# Altium PCB BMSPowerDistribution.PcbDoc (part 4 of 6)
Units mil, origin at the board's own origin, x right, y up, seen from the top; angles counter-clockwise.
Board outline 5328.74 x 5315 mil, 4 copper layers (Top Layer, Layer 1, Layer 2, Bottom Layer), stack 24.6 mil thick; 321 components, 209 nets, 1075 pads, 489 vias.
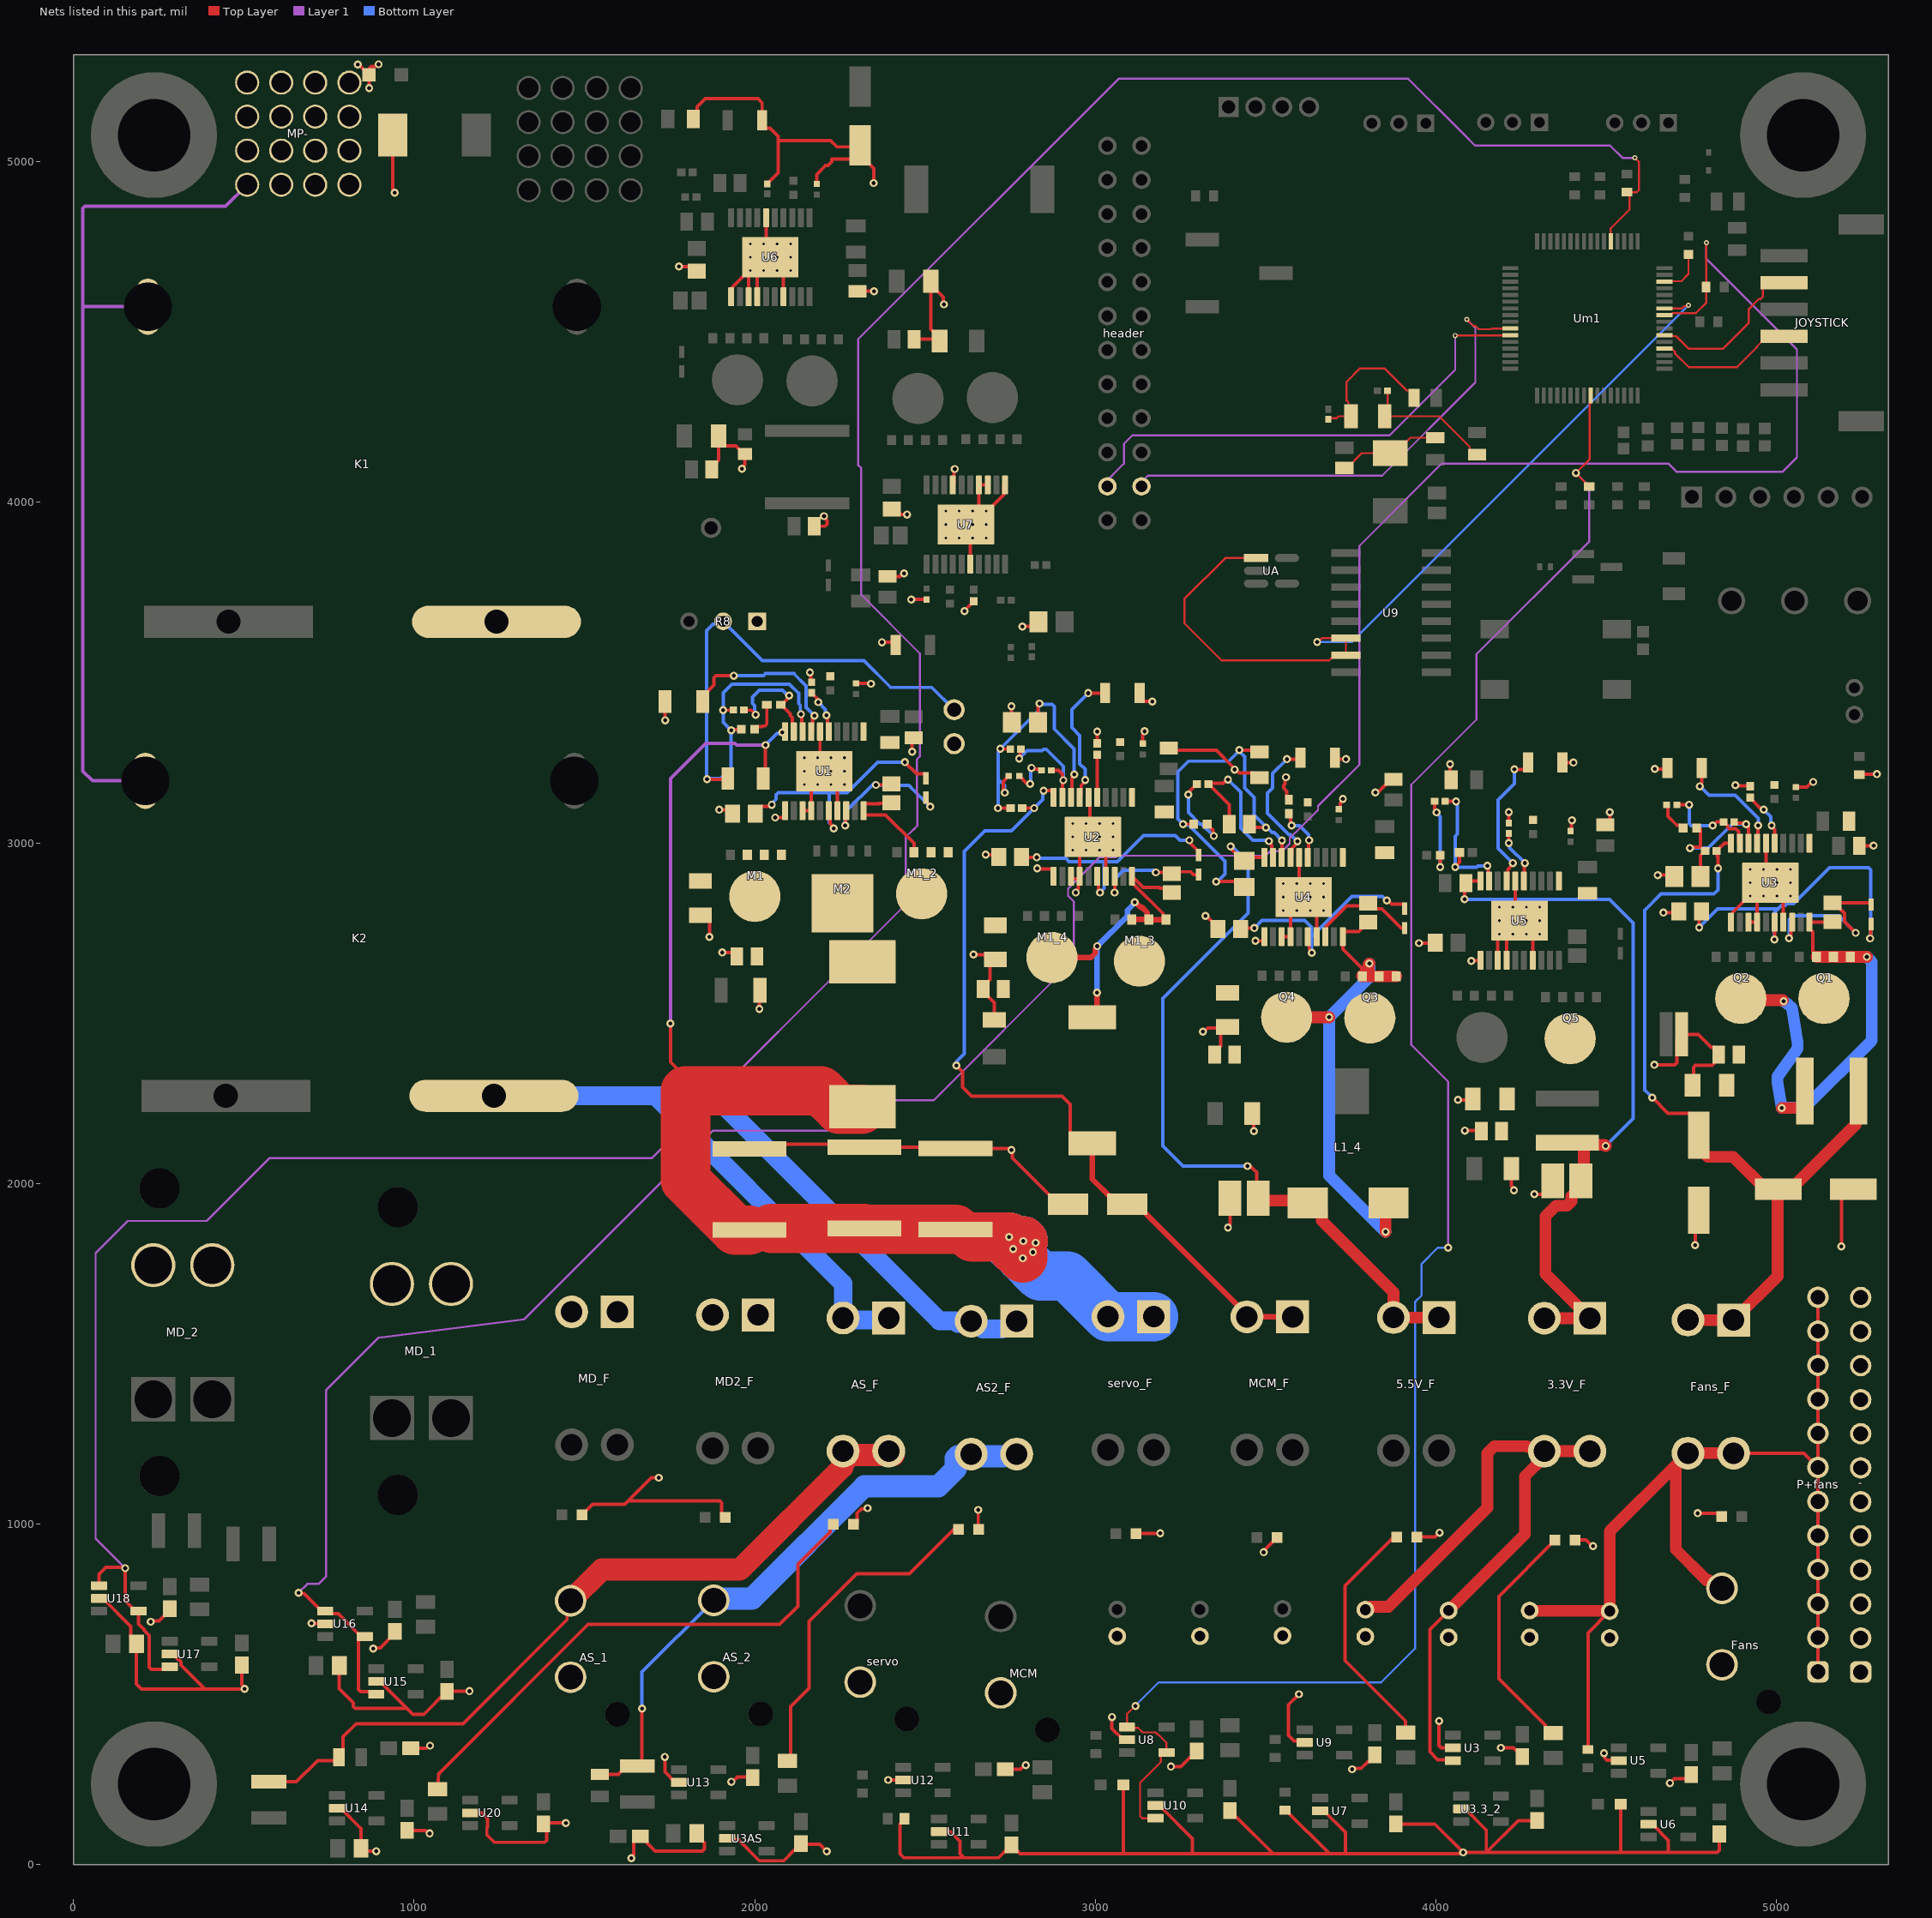
[diagram p5: the nets of this part, all layers, seen from the top]

## Via types
v1: diameter 23.62, hole 11.81, Top Layer to Bottom Layer, 370 vias
v2: diameter 19.68, hole 7.87, Top Layer to Bottom Layer, 84 vias
v3: diameter 15, hole 8, Top Layer to Bottom Layer, 35 vias

## Nets (pads, with @x,y where several pads share a name; then routed paths per layer and width w, separated by ;. In a path a pad name is that pad's centre, name@x,y a point inside that pad or via, vN(x,y) a via of type N, cw(c..) or ccw(c..) an arc to the next point about the centre after c; other vN are vias at no path point) (continued)
GND: 3.3_E.2 3.3_LG.2 3.3V_L.1 5.5V_L.1 5_E.2 5_ECB.2 5_LG.2 12_E.2 12_ECB.2 -.1 -.2 -.3 -.4 -.5 -.6 -.7 -.8 -.9 -.10 -.11 -.12 AS2_L.1 AS_1.2 AS_2.2 AS_L.1 C14.2 C15.2 C16.1 C17.2 C21.1 C22.2 C23.2 C24.2 C25.2 C26.1 C31.1 C40.2 C41.2 C42.2 C61.2 C62.2 C63.2 C64.1 C67.1 C69.2 C70.2 C71.1 C72.1 C75.1 C77.2 C78.2 C79.2 C80.2 C81.1 C84.1 C86.2 Cb1.2 Cb2.2 Cb3.2 Cb4.2 Cb5.2 Cb6.2 Cb7.2 Cb8.2 Cb9.2 Cb11.2 Cb12.2 Cb13.2 Cb14.2 Cb16.2 Cb17.2 Cb18.2 Cb19.2 Cbp2.2 Cbp.2 Cbx.2 Ci6.2 Ci7.2 Cin2.2 Cinx2.2 Co_6.2 Cr7.2 CR15.2 Cr.2 Cs7.1 Cs.1 Ct7.2 Cv7.1 Cv.1 Cx6.2 Cx7.2 F_L.1 Fans.2 J2.2 K1.6 K2.6 MCM.2@2722.44,503.94 MCM_L.1 MD2_L.1 MD_1.21 MD_1.22 MD_2.21 MD_2.22 MD_L.1 MP-.1 NT1.2 R3.1 R4.2 R6.1 R8.3 R11.2 R13.1 R14.2 R17.2 R19.1 R21.2 R23.1 R24.2 R27.2 R29.1 R41.2 R43.1 R44.2 R47.2 R49.1 R51.2 R54.1 R55.2 R57.2 R59.1 RAS2.1 RAS4.1 Rb7.1 Rfb.1 RM2.1 RM4.1 Rs7.2 Rs.1 RSW.1 Rt7.2 Rt.2 RU2.1 Ruv7.1 servo.2 servo_L.1 U1.6 U1.11 U1.13 U1.14 U1.17 U1.21 U2.6 U2.11 U2.13 U2.14 U2.17 U2.21 U3.2@4050.2,342.52 U3.3_2.2 U3.6 U3.11 U3.13 U3.14 U3.17 U3.21 U3AS.2 U4.6 U4.11 U4.13 U4.14 U4.17 U4.21 U5.2@4537.4,305.12 U5.6 U5.11 U5.13 U5.14 U5.17 U5.21 U6.2@4625,118.11 U6.6 U6.11 U6.13 U6.14 U6.17 U6.21 U7.2@3660.43,157.48 U7.6 U7.11 U7.13 U7.14 U7.17 U7.21 U8.2 U9.2@3615.16,358.27 U10.2 U11.2 U12.2 U13.2 U14.2 U15.2 U16.2 U17.2 U18.2 U20.2 | length 22803.5
  Top Layer w10: U18.2@74.8,781.5 85.63,781.5 168.24,698.89 168.24,664.46 RM4.1@184.89,647.81 184.89,529.68 199.8,514.77 385.82,514.77 ; K2.6@210.8,3182.57 K2.6@219.35,3174.02 ; v1(226.38,712.6) 228.98,715.2 251.49,715.2 282.48,746.2 Cb3.2@282.48,750.98 ; U17.2@282.48,618.11 293.31,618.11 301.1,610.31 301.1,608.36 306.96,602.5 308.71,602.5 315.1,596.11 315.1,585.49 385.82,514.77 ; Cb4.2@494.09,585.61 494.09,527.31 501.97,519.43 v1(501.97,515.75) 500.99,514.77 385.82,514.77 ; v1(698.82,708.66) 699.8,707.68 738.19,707.68 U16.2@739.17,706.69 ; U14.2@773.62,165.35 784.45,165.35 844.49,105.31 RAS2.1@844.49,47.24 844.49,41.34 846.83,39 v1(888.72,39) ; RM2.1@780.51,584.65 780.51,516.2 821.72,475 821.72,463.86 827.57,458 979.01,458 ; v1(834.82,5286.42) 837.08,5286.42 NT1.2@867.6,5255.91 ; v1(868.11,5216.54) 868.11,5255.39 NT1.2@867.6,5255.91 ; v1(879.92,633.86) 882.53,636.46 900.3,636.46 943.24,679.41 Cb1.2@943.24,684.19 ; U15.2@888.78,537.4 899.61,537.4 979.01,458 ; v1(895.67,5286.72) 891.98,5286.72 885.17,5279.91 873.87,5279.91 868.6,5274.63 868.6,5256.91 NT1.2@867.6,5255.91 ; CR15.2@936.83,5078.74 936.83,4919.21 942.91,4913.13 v1(942.91,4909.45) ; Cb5.2@979.72,100 1033.03,100 1042.03,91 v1(1045.72,91) ; Cbp2.2@990.16,341.54 1035.8,341.54 1043.02,348.76 v1(1046.71,348.76) ; Cb2.2@1096.46,507.84 1097.62,509 v1(1162.72,509) ; Cb2.2@1096.46,508.84 1028.56,440.94 996.06,440.94 979.01,458 ; U20.2@1156.64,143.82 U20.2@1164.43,151.61 1198.88,151.61 1215.2,135.29 1215.2,109.86 1213.65,108.3 1213.65,87.59 1236.24,65 1382.86,65 1388.72,70.86 1388.72,110.38 Cb6.2@1379.98,119.11 1382.87,122 v1(1445.72,122) ; MD_L.1@1493.11,1026.57 1524.53,1057.99 1618.63,1057.99 1628.55,1067.91 ; v1(1637.8,18.7) 1637.8,22.39 1644.68,29.27 1644.68,67.75 1659.6,82.68 Cbp.2@1664.39,82.68 1669.17,82.68 1684.1,67.75 1684.1,62.97 1707.7,39.37 1846.5,39.37 1852.36,45.23 1852.36,63.12 1846.5,68.98 1846.38,68.98 1839.57,75.79 RAS4.1@1839.57,93.5 ; v1(1718.5,1135.83) 1696.46,1135.83 1628.55,1067.91 ; v1(1736.22,315.94) 1736.22,271.65 1766.73,241.14 U13.2@1777.56,241.14 ; v1(1737.2,3360.24) C17.2@1737.2,3415.35 ; v1(1777.56,4692.91) 1817.32,4692.91 Cv.1@1830.44,4679.8 ; Rfb.1@1819.98,5125.98 1831.48,5137.49 1831.48,5162.19 1855.31,5186.02 2009.84,5186.02 2021.96,5173.91 Cs.1@2021.96,5122.05 2021.96,5109.19 2031.96,5099.19 2044.81,5099.19 2068.9,5075.11 2068.9,5062.99 ; C14.2@1840.55,2787.4 1851.41,2787.4 1867.32,2771.49 v1(1867.32,2724.35) ; Cx6.2@1875.26,4098.43 Cx6.2@1873.97,4097.13 1873.97,4105.01 1893.67,4124.71 Ci6.2@1893.67,4184.28 ; Ci6.2@1893.67,4195.13 Ci6.2@1893.67,4184.28 ; v1(1895.67,3097.44) 1923.48,3097.44 C21.1@1935.29,3085.63 ; MD2_L.1@1903.54,1013.78 1903.54,1062.06 1897.69,1067.91 1628.55,1067.91 ; v1(1904.5,2678.23) 1935.99,2678.23 C15.2@1947.8,2666.42 ; U3AS.2@1919.29,76.77 1923.27,72.79 1951.82,72.79 2013.78,10.83 2085.67,10.83 2116.12,41.28 2120.9,41.28 2135.83,56.2 Cb8.2@2135.83,60.99 2137.76,59.06 2190.94,59.06 v1(2211.61,38.39) ; U6.11@1931.04,4604.08 1934.9,4607.94 1934.9,4632.55 2022.57,4720.22 v2(2026.51,4720.22) U6.21@2036.27,4720.22 ; v1(1931.71,242.97) 1935.4,242.97 1949.72,257.29 1991.69,257.29 Cb7.2@1994.09,254.88 ; v1(1962.6,4098.43) 1962.6,4101.73 1971.44,4110.58 Rs.1@1971.44,4142.59 1968.49,4142.59 1944.53,4166.55 1911.4,4166.55 Ci6.2@1893.67,4184.28 ; U6.13@1982.22,4604.08 1982.22,4666.17 U6.21@2036.27,4720.22 ; C22.2@1989.17,2115.16 2312.65,2115.16 C24.2@2321.72,2106.09 2586.72,2106.09 C23.2@2589.72,2103.09 2745.58,2103.09 2750.25,2098.43 v1(2753.94,2098.43) 2756.54,2095.82 2756.54,2075 2873.54,1958 C40.2@2901.1,1958 ; U6.14@2007.81,4604.08 2007.81,4681.84 U6.21@2046.2,4720.22 ; v1(2013.84,2512.45) 2013.84,2565.1 R6.1@2015.66,2566.93 ; U6.6@2033.4,4836.37 2033.4,4733.02 U6.21@2046.2,4720.22 ; Cr.2@2037.51,4935.76 2037.51,4936.6 2068.9,4967.99 2068.9,5062.99 ; v1(2060.31,3074.53) 2085.7,3074.53 2085.7,3079.53 2089.56,3083.39 U1.11@2089.56,3094.86 ; U6.17@2084.58,4604.08 2084.58,4681.84 U6.21@2046.2,4720.22 ; U1.13@2140.74,3094.86 2143.03,3094.98 2144.6,3094.86 U1.14@2166.33,3094.86 2166.33,3172.61 U1.21@2204.72,3211 2243.1,3172.61 U1.17@2243.1,3094.86 ; v1(2162.32,3501.06) 2164.82,3498.56 2164.82,3474.15 C16.1@2167.32,3471.65 ; Co_6.2@2174.97,3930.13 2206.35,3930.13 2212.21,3935.99 2212.21,3947.5 2203.66,3956.05 v1(2203.66,3959.73) ; Rt.2@2182.51,4935.52 2182.51,4963.53 2208.23,4989.25 2215.63,4989.25 2226.85,5000.48 2226.85,5007.87 Ct7.2@2308.91,5007.87 ; v2(2185.03,3250.37) 2191.92,3257.26 U1.6@2191.92,3327.14 ; AS_L.1@2293.19,996.18 2301.1,1004.09 2301.1,1031.86 2312.89,1043.65 2329.09,1043.65 v1(2331.69,1046.26) ; R4.2@2297.24,3468.67 2297.82,3468.1 2340.96,3468.1 v1(2341.54,3467.52) ; RU2.1@2302.17,4620.08 v1(2350.39,4620.08) ; Ct7.2@2308.91,5012.8 Ct7.2@2327.53,4994.17 ; Ct7.2@2310.04,5048.23 Ct7.2@2310.04,5044.29 ; Ct7.2@2318.9,5044.29 Ct7.2@2310.04,5044.29 ; v1(2349.41,4937.99) 2349.41,4981.3 2310.04,5020.67 Ct7.2@2310.04,5044.29 ; v1(2373.85,3589.37) 2404.07,3589.37 2415.05,3578.38 Cs7.1@2415.05,3569.88 ; Ruv7.1@2390.44,3782.65 2426.83,3782.65 2435.52,3791.34 v1(2438.98,3791.34) ; v1(2391.73,248.03) U12.2@2436.02,248.03 ; Cv7.1@2402.56,3980.57 2418.56,3964.57 v1(2447.83,3964.57) ; R11.2@2439.58,133.86 2439.58,131.36 2426.18,117.96 2426.18,31.5 2437.99,19.69 2615.16,19.69 ; v1(2459.65,3714.57) 2460.14,3715.06 Rt7.2@2504.72,3715.06 ; v1(2462.55,3267.72) 2462.55,3305.07 R3.1@2466.54,3309.06 ; Cx7.2@2467.97,4479.13 Rs7.2@2538.26,4479.13 ; Ci7.2@2517.75,4649.58 Ci7.2@2517.75,4638.72 ; U11.2@2541.34,96.46 2574.8,96.46 2603.03,68.23 2603.03,31.81 2615.16,19.69 ; Rs7.2@2543.26,4474.13 Rs7.2@2538.26,4479.13 ; v1(2556.02,4581.58) 2553.42,4584.19 2553.42,4603.05 Ci7.2@2517.75,4638.72 ; U7.17@2582,4051.18 2585.05,4054.23 2585.05,4095.7 v1(2587.66,4098.3) ; v1(2616.14,3681.1) 2616.14,3682.59 2642.72,3709.17 Cr7.2@2642.72,3710.02 ; U7.6@2633.18,3818.89 2633.18,3922.24 U7.21@2620.39,3935.04 ; v1(2642.64,2672.13) 2678.11,2672.13 Cin2.2@2678.11,2661.42 ; v1(2656.5,1041.34) 2656.5,985.24 AS2_L.1@2657.48,984.25 ; Cinx2.2@2671.26,2562.99 2703.72,2530.54 R17.2@2703.72,2480 ; Cinx2.2@2671.26,2570.87 2671.26,2578.74 2684.96,2592.44 2685.09,2592.44 2690.94,2598.3 2690.94,2648.58 Cin2.2@2678.11,2661.42 ; v1(2678.6,2965.56) 2709.65,2965.56 C31.1@2716.72,2958.5 ; U7.13@2684.37,4051.18 U7.14@2658.77,4051.18 2658.77,3973.42 U7.21@2620.39,3935.04 ; Cin2.2@2706.69,2657.48 2702.76,2661.42 Cin2.2@2678.11,2661.42 ; U7.11@2735.55,4051.18 2731.69,4047.32 2731.69,4022.71 2644.01,3935.04 v2(2640.07,3935.04) U7.21@2620.39,3935.04 ; Cb9.2@2736.26,279.53 2780.76,279.53 2792.57,291.34 v1(2796.26,291.34) ; Cb11.2@2753.94,57.05 Cb11.2@2753.94,52.26 ; v1(2753.94,3401.57) 2753.94,3355.32 R19.1@2754.92,3354.33 ; v1(2786.42,3635.83) 2819.88,3635.83 Rb7.1@2833.66,3649.61 ; v1(2829.72,2925.56) 2831.34,2923.94 2874.13,2923.94 2877.99,2920.08 U2.11@2877.99,2901.72 ; U2.13@2929.17,2901.72 2929.17,2897.98 2933.03,2894.13 2947.17,2894.13 U2.14@2954.76,2901.72 2954.76,2979.47 U2.21@2993.15,3017.86 ; v1(2942.91,2854.33) 2942.91,2858.02 2950.91,2866.01 U2.14@2950.91,2896.31 ; U2.6@2980.35,3134 2984.21,3130.14 2984.21,3026.8 U2.21@2993.15,3017.86 ; C25.2@3005.91,3292.46 v1(3005.91,3326.77) ; U2.17@3031.54,2901.72 3031.54,2979.47 U2.21@2993.15,3017.86 ; v1(3049.21,433.07) 3049.21,399.61 3082.68,366.14 U8.2@3093.5,366.14 ; R21.2@3082.68,234.25 3082.68,33.46 3080.71,31.5 ; servo_L.1@3120.08,971.46 3121.06,972.44 v1(3190.94,972.44) ; C26.1@3130.15,3439.85 3130.15,3425.35 3140.15,3415.35 v1(3167.32,3415.35) ; R14.2@3139.76,3291.51 3139.76,3295.64 3139.85,3295.72 3139.85,3319.23 3144.76,3324.15 v1(3144.76,3327.83) ; U10.2@3177.17,173.23 3187.99,173.23 3285.43,75.79 3285.43,31.5 ; v1(3222.44,287.4) 3251.83,287.4 3277.87,313.43 3282.65,313.43 3297.57,328.36 Cb12.2@3297.57,333.14 ; 3245.83,3272.25 3355.31,3272.25 v1@3405.59,3221.97 ; v1(3315.87,2445.98) 3319.55,2445.98 3330.27,2456.69 C69.2@3375.01,2456.69 ; v1(3323.74,2785.59) 3326.48,2785.59 3360.24,2751.83 C75.1@3360.24,2747.33 ; C70.2@3350.39,2377.95 3350.39,2385.83 3368.11,2403.54 3368.11,2449.8 C69.2@3375.01,2456.69 ; C69.2@3388.72,2459.54 3385.86,2456.69 C69.2@3375.01,2456.69 ; v1(3389.74,1870.08) 3389.74,1873.76 3395.62,1879.65 C77.2@3395.62,1956.69 ; Cb13.2@3395.67,158.45 3395.67,153.66 3410.59,138.74 3415.38,138.74 3522.62,31.5 ; v1(3409.45,3215.47) 3413.13,3215.47 3422.68,3205.93 3459.78,3205.93 3475.67,3190.04 R49.1@3475.67,3189.07 ; R47.2@3460.9,2205 3465.77,2200.13 v1(3465.77,2153.82) ; v1(3470.47,2712.6) 3492.72,2712.6 3496.58,2716.46 U4.11@3496.58,2725 ; v1(3494.5,916.92) 3497.11,919.52 3497.11,923.29 MCM_L.1@3534.45,960.63 ; U4.13@3547.76,2725 U4.14@3573.35,2725 3573.35,2802.76 U4.21@3611.74,2841.14 ; R51.2@3557.09,159.31 3560.11,159.31 3687.92,31.5 ; v1(3560.04,3192.91) 3557.43,3190.31 3557.43,3173.1 3553.72,3169.39 3553.72,3161.1 3562.9,3151.92 3562.9,3132.8 C71.1@3568.9,3126.8 ; v1(3598.43,500) 3567.57,469.14 3567.57,379.28 3583.62,363.23 3610.19,363.23 U9.2@3615.16,358.27 ; U4.6@3598.94,2957.28 3598.94,2853.94 U4.21@3611.74,2841.14 ; U4.17@3650.13,2725 3650.13,2802.76 U4.21@3611.74,2841.14 ; U7.2@3660.43,157.48 3671.26,157.48 3734.25,94.49 3734.25,31.5 ; C72.1@3704.04,3250 3707.98,3246.06 v1(3736.22,3246.06) ; R44.2@3715.05,3098.85 3715.13,3098.85 3719.35,3103.06 3719.35,3117.93 3727.38,3125.96 v1(3727.38,3129.65) ; v1(3753.94,279.53) 3756.12,281.71 3780.75,281.71 3801.16,302.12 3805.94,302.12 3820.87,317.05 Cb16.2@3820.87,321.83 ; v1(3822.74,3148.01) 3825.34,3150.62 3831.72,3150.62 3868.11,3187.01 R43.1@3875.98,3187.01 ; Cb17.2@3882.87,119.08 3997.07,119.08 v1(4080.71,35.43) ; 5.5V_L.1@3944.88,961.61 3998.03,961.61 v1(4010.83,974.41) ; v1(3950.79,2705.71) 3998.03,2705.71 C84.1@3998.82,2706.5 ; v1(4009.84,421.26) 4009.84,348.38 4015.7,342.52 U3.2@4050.2,342.52 ; v1(4042.1,3231.5) 4042.1,3188.19 R59.1@4045.25,3185.04 ; v1(4065.48,2245.44) 4106.63,2245.44 C78.2@4109.22,2248.03 ; U3.3_2.2@4074.8,163.39 4085.63,163.39 4148.41,100.6 4148.41,35.43 ; v1(4085.4,2155.34) 4132.06,2155.34 C79.2@4133.86,2153.54 ; v1(4104.33,2653.54) 4128.76,2653.54 U5.11@4130.94,2655.72 ; U5.13@4182.13,2655.72 4182.13,2717.81 U5.21@4207.72,2743.4 ; v1(4190.94,342.52) 4228.31,342.52 4234.23,336.6 4239.01,336.6 4253.94,321.68 Cb18.2@4253.94,316.89 ; U5.14@4207.72,2655.72 U5.21@4207.72,2743.4 ; U5.21@4207.72,2746.28 U5.21@4207.72,2743.4 ; C80.2@4214.57,3058.21 v1(4214.57,3090.55) ; R57.2@4221.51,2043.31 4221.51,1991.35 4229.48,1983.37 v1(4229.48,1979.68) ; U5.21@4229.86,2768.42 4239.7,2778.26 4233.31,2784.66 U5.6@4233.31,2888.01 ; U5.17@4284.49,2655.72 4284.49,2733.48 U5.21@4246.1,2771.87 4236.18,2771.87 U5.21@4207.72,2743.4 ; v1(4289.66,1968.21) 4314.91,1968.21 4343.43,1996.73 C86.2@4343.43,2007.5 ; Cb19.2@4297.24,128.92 4241.9,128.92 4148.41,35.43 ; C81.1@4372.22,3236 v1(4404.39,3236) ; R55.2@4395.79,3035.07 4397.93,3037.21 4397.93,3064.68 v1(4399.72,3066.48) ; 3.3V_L.1@4409.45,952.76 4441.41,952.76 4459.13,935.04 v1(4461.61,935.04) ; v1(4494.09,326.77) 4496.47,324.4 4496.47,311.96 4502.32,306.1 4536.42,306.1 U5.2@4537.4,305.12 ; R54.1@4498.03,3053.15 4511.2,3066.31 v1(4511.2,3090.34) ; R41.2@4543.31,177.17 4543.31,41.34 4537.4,35.43 ; U6.2@4625,118.11 4635.83,118.11 4683.07,70.87 4683.07,35.43 ; v1(4641.81,2348.37) 4701.79,2348.37 4707.65,2354.22 4707.65,2424.19 R27.2@4721.46,2437.99 4770.67,2437.99 4809.13,2399.53 4817.01,2399.53 4830.71,2385.83 C62.2@4830.71,2377.95 4817.01,2364.25 4817.01,2352.63 4811.15,2346.77 4762.72,2346.77 4756.86,2340.92 C61.2@4756.86,2280.51 ; v1(4643.02,3217.38) 4677.7,3217.38 C64.1@4679.81,3219.49 ; v1(4651.57,2905.51) 4696.85,2905.51 R29.1@4700.79,2901.57 ; v1(4668.39,2795.28) 4709.36,2795.28 C67.1@4713.3,2799.22 ; v1(4687.69,239.18) 4700.48,251.97 4738.19,251.97 Cb14.2@4750,263.78 ; v1(4761.81,1818.9) 4761.81,1910.39 C41.2@4772.7,1921.29 ; v1(4768.7,1031.5) 4829.72,1031.5 F_L.1@4839.57,1021.65 ; Cbx.2@4832.68,89.55 4832.68,41.29 4826.82,35.43 4683.07,35.43 ; U3.11@4867.23,2767.15 4871.09,2771 4871.09,2795.61 4958.77,2883.29 v2(4962.7,2883.29) U3.21@4982.39,2883.29 ; v1(4879.92,3169.29) 4881.33,3167.89 4921.82,3167.89 C63.2@4923.23,3166.48 ; U3.13@4918.41,2767.15 U3.14@4944,2767.15 4944,2844.9 U3.21@4982.39,2883.29 ; U3.6@4969.59,2999.43 4969.59,2896.08 U3.21@4982.39,2883.29 ; U3.17@5020.77,2767.15 5020.77,2844.9 U3.21@4982.39,2883.29 ; R24.2@5057.09,3164.23 5089.71,3164.23 5104.7,3179.21 v1(5108.38,3179.21) ; v1(5190.94,1814.96) 5190.94,1956.79 5217.44,1983.29 C42.2@5226.18,1983.29 ; R23.1@5243.7,2991.82 v1(5285.7,2991.82) ; RSW.1@5244.09,3200.72 5244.73,3201.36 5294.36,3201.36 v1(5295,3202) ; U6.21@2036.27,4720.22 U6.21@2046.2,4720.22 ; 2068.9,5062.99 2222.44,5062.99 2241.14,5044.29 Ct7.2@2310.04,5044.29 ; Ci7.2@2517.75,4638.72 2517.75,4508.62 2523.61,4502.76 2525.51,4502.76 2538.26,4490.01 Rs7.2@2538.26,4479.13 ; 2615.16,19.69 2716.57,19.69 2734.23,37.34 2739.01,37.34 Cb11.2@2753.94,52.26 ; Cb11.2@2753.94,52.26 2768.86,37.34 2773.65,37.34 2779.49,31.5 3080.71,31.5 ; 3080.71,31.5 3285.43,31.5 ; 3285.43,31.5 3522.62,31.5 ; 3522.62,31.5 3687.92,31.5 ; 3687.92,31.5 3734.25,31.5 ; 3734.25,31.5 4068.04,31.5 4069.37,32.83 4078.1,32.83 v1(4080.71,35.43) ; v1(4080.71,35.43) 4148.41,35.43 ; 4148.41,35.43 4537.4,35.43 ; 4537.4,35.43 4683.07,35.43
  Layer 1 w10: K2.6@210.8,3182.57 55.61,3182.57 27.51,3210.68 27.51,4574.8 ; K1.6@218.5,4574.8 27.51,4574.8 ; MP-.1@509.84,4933.07 446.85,4870.08 33.37,4870.08 27.51,4864.22 27.51,4574.8
  other v2: 4187.05,2732.5 4226.42,2732.5 4265.79,2732.5 4305.16,2732.5 4187.05,2771.87 4226.42,2771.87 4265.79,2771.87 4305.16,2771.87 3552.68,2801.77 3592.06,2801.77 3631.43,2801.77 3670.8,2801.77 4187.05,2811.24 4226.42,2811.24 4265.79,2811.24 4305.16,2811.24 3552.68,2841.14 3592.06,2841.14 3631.43,2841.14 3670.8,2841.14 4923.33,2843.92 4962.7,2843.92 5002.07,2843.92 5041.44,2843.92 3552.68,2880.51 3592.06,2880.51 3631.43,2880.51 3670.8,2880.51 4923.33,2883.29 5002.07,2883.29 5041.44,2883.29 4923.33,2922.66 4962.7,2922.66 5002.07,2922.66 5041.44,2922.66 2934.09,2978.49 2973.46,2978.49 3012.83,2978.49 3052.2,2978.49 2934.09,3017.86 2973.46,3017.86 3012.83,3017.86 3052.2,3017.86 2934.09,3057.23 2973.46,3057.23 3012.83,3057.23 3052.2,3057.23 2145.66,3171.63 2185.03,3171.63 2224.4,3171.63 2263.77,3171.63 2145.66,3211 2185.03,3211 2224.4,3211 2263.77,3211 2145.66,3250.37 2224.4,3250.37 2263.77,3250.37 2561.33,3895.66 2600.7,3895.66 2640.07,3895.66 2679.44,3895.66 2561.33,3935.04 2600.7,3935.04 2679.44,3935.04 2561.33,3974.41 2600.7,3974.41 2640.07,3974.41 2679.44,3974.41 1987.14,4680.85 2026.51,4680.85 2065.88,4680.85 2105.25,4680.85 1987.14,4720.22 2065.88,4720.22 2105.25,4720.22 1987.14,4759.59 2026.51,4759.59 2065.88,4759.59 2105.25,4759.59
I/O1: header.21 Um1.58 | length 1447.3
  Top Layer w6: v3(4091.4,4537.4) 4110.81,4517.99 4116.98,4517.99 4126.35,4508.62 4162.14,4508.62 4164.37,4510.85 Um1.58@4218.65,4510.85
  Layer 1 w6: header.21@3124.02,4062.99 3138.77,4062.99 3154.51,4078.74 3842.48,4078.74 4116.14,4352.4 4116.14,4512.66 v3(4091.4,4537.4)
I/O2: header.22 Um1.59 | length 1472.7
  Top Layer w6: v3(4057.09,4490.25) 4057.55,4490.71 4218.19,4490.71 Um1.59@4218.65,4491.17
  Layer 1 w6: header.22@3021.65,4051.18 3022.29,4051 3022.29,4051.82 3084.65,4114.17 3084.65,4172.24 3109.25,4196.85 3163.39,4196.85 3864.17,4196.85 4057.09,4389.76 v3(4057.09,4490.25)
LEFT: JOYSTICK.3 Um1.20 | length 415.1
  Top Layer w6: Um1.20@4671.41,4451.8 4674.41,4448.8 4695.98,4448.8 4701.91,4442.86 4701.91,4438.39 4742.66,4397.64 4885.03,4397.64 4942.86,4455.47 4942.86,4457.62 4973.42,4488.19 JOYSTICK.3@5022.64,4488.19
MCM_Fuse: R31.1 U8.1 U8.4 U10.3 Um1.9 | length 5492.5
  Top Layer w6: v1(3118.11,465.55) 3117.13,465.55 3093.5,441.93 U8.1@3093.5,403.54 3095.76,401.29 3126.27,401.29 3139.62,387.94 3177.23,387.94 3183.42,381.75 3185.18,381.75 3209.65,357.28 U8.4@3209.65,328.74 3200.47,328.74 3192.68,320.94 3192.68,300.94 3131.89,240.16 3131.89,141.68 3137.75,135.83 U10.3@3177.17,135.83 ; R31.1@4450.79,4046.33 4447.77,4046.33 4437.8,4056.29 4437.8,4059.31 4411.42,4085.7 v1(4411.42,4086.61) 4452.25,4127.45 4452.25,4289.64 4453.87,4291.26 4453.87,4313 Um1.9@4454.87,4314
  Layer 1 w6: v1(4036.42,1811.02) 4036.42,2298.75 3928.1,2407.06 3928.1,3170.75 4119.55,3362.2 4119.55,3554.59 4450.79,3885.83 4450.79,4047.24 v1(4411.42,4086.61)
  Bottom Layer w6: v1(3118.11,465.55) 3118.11,466.54 3186.07,534.5 3839.61,534.5 3938.98,633.86 3938.98,1651.9 3958.66,1671.58 3958.66,1763.78 4005.91,1811.02 v1(4036.42,1811.02)
MD_Fuse1: R35.1 U15.3 U16.1 U16.4 Um1.25 | length 8162.4
  Top Layer w6: Um1.25@4671.41,4550.22 4688.91,4550.22 4694.62,4555.93 4763.65,4555.93 4794.72,4587 v3(4794.72,4762.94)
  Top Layer w10: v1(660.72,798) 663.32,795.39 677.05,795.39 728.35,744.09 U16.1@739.17,744.09 746.97,736.3 777.48,736.3 844.49,669.29 U16.4@844.86,669.29 ; U16.4@855.31,669.29 U16.4@844.86,669.29 ; U15.3@888.78,500 880.98,507.8 842.47,507.8 836.61,513.65 836.61,650.59 837.06,651.04 837.06,661.5 U16.4@844.86,669.29
  Layer 1 w6: v1(660.72,798) 686.42,823.7 719.57,823.7 741.9,846.03 741.9,1393.48 895.67,1547.24 1323.64,1601.2 1876.92,2154.48 2252.23,2154.48 2342.04,2244.28 2525.78,2244.28 2937.34,2655.85 2937.34,2827.82 2920.23,2844.93 2920.23,2865.63 3012.37,2957.77 3060.79,2957.77 3065.61,2962.6 3500.59,2962.6 3513.43,2975.44 3548.86,2975.44 3571.17,2997.75 3571.17,3013.92 3585.75,3028.5 3586.16,3028.5 3654.3,3096.64 3654.3,3108.35 3775.59,3229.64 3775.59,3872.3 4017.46,4114.17 4682.66,4114.17 4706.51,4090.31 5018.84,4090.31 5060.4,4131.88 5060.4,4449.44 4794.72,4715.13 v3(4794.72,4762.94)
MD_Fuse2: R36.1 U17.3 U18.1 U18.4 Um1.37 | length 9034.1
  Top Layer w6: Um1.37@4513.93,4766.76 4513.93,4805.26 4568.9,4860.22 4568.9,4903.41 R36.1@4561.02,4911.28 ; R36.1@4558,4911.28 R36.1@4561.02,4911.28 ; v3(4584.65,5011.81) 4596.46,5000 4596.46,4917.32 4590.42,4911.28 R36.1@4561.02,4911.28
  Top Layer w10: U18.1@74.8,818.9 74.8,852.36 95.13,872.69 148.97,872.69 v1(151.57,870.08) 151.57,774.56 172.32,753.81 172.32,751.89 180.12,744.09 U18.4@190.94,744.09 190.94,706.61 208.55,689 208.55,686.09 222.44,672.2 222.44,578.8 228.3,572.94 274.71,572.94 U17.3@282.48,580.71
  Layer 1 w6: v1(151.57,870.08) 64.96,956.69 64.96,1795.28 159.45,1889.76 390.96,1889.76 576,2074.8 1698.82,2074.8 2443.85,2819.83 2443.85,3017.27 2465.01,3038.43 2465.6,3038.43 2477.41,3050.24 2477.41,3146.9 2476.33,3147.98 2476.33,3245.43 2485.24,3254.34 2485.24,3556.32 2312.99,3728.57 2312.99,4100.46 2304.09,4109.36 2304.09,4479.28 3068.9,5244.09 3919.29,5244.09 4080.98,5082.41 4115.2,5048.18 4511.94,5048.18 4548.31,5011.81 v3(4584.65,5011.81)
micro_relay: U9.6 U9.7 UA.1 Um1.26 | length 2541.8
  Top Layer w6: UA.1@3472.42,3836.61 3381.89,3836.61 3261.81,3716.54 3261.81,3645.67 3371.28,3536.2 3687.77,3536.2 3694.76,3543.18 3696.47,3543.18 3708.2,3554.92 U9.7@3708.2,3556.63 ; v1@3655.26,3590.55 3665.89,3601.18 U9.6@3735.97,3601.18 U9.7@3735.97,3551.18 ; Um1.26@4671.41,4569.91 4722.58,4569.91 4728.81,4576.13 4739.52,4576.13 v3(4742.13,4578.74)
  Bottom Layer w6: v1(3651.57,3590.55) 3753.94,3590.55 v3(4742.13,4578.74)
MID: JOYSTICK.5 Um1.22 | length 460.6
  Top Layer w6: Um1.22@4671.41,4491.17 4672.41,4490.17 4694.15,4490.17 4695.77,4488.54 4705.55,4488.54 4743.1,4451 4842.73,4451 4919.29,4527.56 4919.29,4567.81 4949.16,4597.68 4953.98,4597.68 4960.72,4604.42 4960.72,4630.98 4980.37,4650.64 JOYSTICK.5@4993.56,4650.64
Net3.3_E_1: 3.3_E.1 3.3_LG.1 3.3V_F.2 U3.3@4050.2,305.12 | length 2059.5
  Top Layer w10: 3.3_LG.1@4037.72,745.74 3982.28,690.31 3982.28,330.71 4005.62,307.37 4047.94,307.37 U3.3@4050.2,305.12
  Top Layer w34.65: 3.3_E.1@3793.31,748.03 3798,748.03 3806.68,756.71 3861.04,756.71 4151.57,1047.24 4151.57,1208.05 4171.87,1228.35 4267.59,1228.35 4270.38,1225.55 4306.96,1225.55 3.3V_F.2@4318.79,1213.72 ; 3.3_LG.1@4037.72,745.74 4261.81,969.83 4261.81,1140.02 4318.79,1197 3.3V_F.2@4318.79,1213.72 ; 3.3V_F.2@4452.65,1213.72 3.3V_F.2@4318.79,1213.72
Net3.3V_F_1: 3.3V_F.1 C86.1 L1_5.2 R58.2 U5.10 | length 2185.3
  Top Layer w10: v1(4084.65,2834.65) 4084.65,2877.95 4094.7,2888.01 U5.10@4130.94,2888.01
  Top Layer w34.65: 3.3V_F.1@4318.79,1604.28 3.3V_F.1@4452.65,1604.28 4321.85,1735.07 4321.85,1903.19 4353.53,1934.87 4385.79,1934.87 4398.28,1947.36 4398.28,1961.83 4426.16,1989.72 C86.1@4426.16,2007.5 4435.04,2016.38 L1_5.2@4435.04,2113.43 ; L1_5.2@4386.16,2119.34 4429.13,2119.34 L1_5.2@4435.04,2113.43 ; v1(4498.97,2110.24) 4495.77,2113.43 L1_5.2@4435.04,2113.43
  Bottom Layer w10: v1(4084.65,2834.65) 4509.84,2834.65 4579.72,2764.76 4579.72,2190.99 v1(4498.97,2110.24)
Net3.3V_L_2: 3.3V_L.2 RL1.2 | length 708.9
  Top Layer w10: RL1.2@4344.49,385.83 4336.61,385.83 4320.94,401.5 4320.94,409.37 4185.04,545.28 4185.04,787.4 3.3V_L.2@4350.39,952.76 3.3V_L.2@4352.36,950.79
Net5.5V_F_1: 5.5V_F.1 C77.1 L1_4.1 R48.2 U4.10 | length 2251.1
  Top Layer w10: v1(3397.57,2989.89) 3400.18,2987.28 3400.18,2981.71 3424.88,2957.01 3434.06,2947.83 R48.2@3437.99,2947.83 ; R48.2@3428.88,2957.28 U4.10@3496.58,2957.28 ; v1(3446.85,2051.18) 3449.46,2048.57 3458.05,2048.57 3466.57,2040.06 3473.64,2032.99 C77.1@3473.64,1961.4
  Top Layer w34.65: C77.1@3473.64,1961.4 C77.1@3478.35,1956.69 3485.14,1949.9 3617.22,1949.9 L1_4.1@3624.02,1943.11 3637.52,1943.11 3665.69,1914.93 3665.69,1890.41 3875.79,1680.32 5.5V_F.1@3875.79,1606.28 5.5V_F.1@4009.65,1606.28
  Bottom Layer w10: v1@3401.57,2990.16 3448.82,2942.91 3448.82,2793.31 3198.82,2543.31 3198.82,2110.24 3257.87,2051.18 v1(3446.85,2051.18)
Net5.5V_L_2: 5.5V_L.2 RL2.2 | length 715.3
  Top Layer w10: 5.5V_L.2@3882.38,967.03 3733.84,818.49 3733.84,598.84 3911.42,421.26 RL2.2@3911.42,386.81
Net12_E_1: 12_E.1 12_ECB.1 Fans.1 Fans_F.2 P+fans.1 P+fans.2 P+fans.3 P+fans.4 P+fans.5 P+fans.6 P+fans.7 P+fans.8 P+fans.9 P+fans.10 P+fans.11 P+fans.12 R40.1 | length 3156.8
  Top Layer w10: R40.1@4446.85,337.67 4446.85,680.13 12_ECB.1@4510.72,744 ; Fans_F.2@4874.57,1208 5080.43,1208 P+fans.7@5122.46,1165.97 ; P+fans.1@5122.46,565.97 P+fans.2@5122.46,665.97 P+fans.3@5122.46,765.97 P+fans.4@5122.46,865.97 P+fans.5@5122.46,965.97 P+fans.6@5122.46,1065.97 P+fans.7@5122.46,1165.97 ; P+fans.12@5122.46,1665.97 P+fans.11@5122.46,1565.97 P+fans.10@5122.46,1465.97 P+fans.9@5122.46,1365.97 P+fans.8@5122.46,1265.97 P+fans.7@5122.46,1165.97
  Top Layer w34.65: 12_E.1@4275.72,745.74 4276.59,744.87 4509.85,744.87 12_ECB.1@4510.72,744 4510.72,978 4704.72,1172.01 ; Fans.1@4831.33,798.28 4831.33,804.6 4801,834.93 4794.68,834.93 4704.72,924.88 4704.72,1172.01 ; Fans_F.2@4874.57,1208 Fans_F.2@4740.72,1208 4718.5,1185.79 4704.72,1172.01
NetAS2_F_1: AS2_F.1 AS_F.1 K2.4 MD2_F.1 MD_F.1 | length 2789.7
  Bottom Layer w55.12: K2.4@1234.42,2257.38 1708.17,2257.38 ; AS_F.1@2259.84,1604.72 2259.84,1705.71 1708.17,2257.38 ; AS_F.1@2265.85,1598.71 2387.69,1598.71 AS_F.1@2393.7,1604.72 ; AS2_F.1@2635.83,1588.98 2596.46,1588.98 2588.55,1596.89 2541.89,1596.89 1881.4,2257.38 1708.17,2257.38 ; AS2_F.1@2635.83,1595.87 2647.01,1595.87 2670.04,1572.83 AS2_F.1@2726.21,1572.83
NetAS2_F_2: AS2_F.2 AS_2.1 RAS3.1 RJ6.1 | length 1742.4
  Top Layer w10: RJ6.1@1545.28,264.76 1599.36,264.76 1623.99,289.4 1654.51,289.4 1669.29,304.18 v1(1669.29,457.68)
  Bottom Layer w10: v1(1669.29,457.68) 1669.29,564.96 AS_2.1@1879.92,775.59
  Bottom Layer w64.96: AS_2.1@1879.92,775.59 1885.29,780.96 1992.62,780.96 2322.29,1110.63 2539.11,1110.63 2590.43,1161.95 2590.43,1192.4 2596.46,1198.43 AS2_F.2@2730.31,1198.43
NetAS2_L_2: AS2_L.2 RL6.2 | length 982.9
  Top Layer w10: RL6.2@2096.46,304.13 2105.32,312.99 2105.32,463.25 2159.41,517.34 2159.41,713.54 2299.21,853.35 2454.72,853.35 AS2_L.2@2592.03,990.65
NetAS_1_1: AS_1.1 AS_F.2 RAS.1 RJ7.1 | length 2297.1
  Top Layer w10: RAS.1@573.72,243.18 654.54,243.18 716.66,305.3 769.86,305.3 791.26,326.69 791.26,374.92 829.72,413.39 1143.7,413.39 1449.08,718.77 1449.08,764.04 AS_1.1@1459.45,774.41
  Top Layer w64.96: AS_1.1@1459.45,774.41 1551.18,866.14 1956.69,866.14 2257.87,1167.32 2257.87,1178.09 2273.62,1193.84 2273.62,1202.36 AS_F.2@2407.48,1202.36
NetAS_L_2: AS_L.2 RL7.2 | length 1587.2
  Top Layer w10: RL7.2@1068.9,221.46 1071.55,265.45 1510.83,704.72 2072.83,704.72 2126.53,758.42 2126.53,881.45 2221.34,976.26 2221.34,989.06 AS_L.2@2231.3,999.02
NetC14_1: C14.1 C15.1 C61.1 C62.1 C69.1 C70.1 C78.1 C79.1 Cin2.1 Cinx2.1 K1.4 M1.5-6-7-8 M1_2.5-6-7-8 M1_3.5-6-7-8 Q1.5-6-7-8 Q3.5-6-7-8 Q5.5-6-7-8 R1.1 R2.1 R12.1 R16.1 R22.1 R26.1 R42.1 R46.1 R53.1 R60.1 U1.1 U2.1 U3.1@5097.55,2999.43 U4.1 U5.1@4361.26,2888.01 | length 0.6
  Top Layer w10: M1.5-6-7-8@2000.72,2843 M1.5-6-7-8@2001.15,2843.43
NetC16_2: C16.2 U1.5 | length 134.6
  Top Layer w10: C16.2@2167.32,3440.94 2167.32,3440.16 2184.4,3423.08 2184.4,3415.99 v1(2187.01,3413.39) ; v1(2210.64,3374.61) 2210.64,3370.93 2213.65,3367.91 2213.65,3331 U1.5@2217.51,3327.14
  Bottom Layer w10: v1(2187.01,3413.39) 2208.03,3392.36 2208.03,3377.22 v1(2210.64,3374.61)
NetC17_1: C17.1 U1.7 | length 521.5
  Top Layer w10: C17.1@1847.44,3415.35 1847.44,3430.12 1880.71,3463.39 1880.71,3485.28 1886.57,3491.14 v1(1938.98,3491.14) ; U1.7@2166.33,3327.14 2170.19,3331 2170.19,3365.32 2175.2,3370.33 v1(2175.2,3374.02)
  Bottom Layer w10: v1(1938.98,3491.14) 2025.96,3491.14 2031.86,3497.05 2115.16,3497.05 2150.79,3461.42 2150.79,3398.43 v1(2175.2,3374.02)
NetC18_1: C18.1 R5.2 | length 98.3
  Top Layer w10: R5.2@2000.09,3334 2007.88,3341.8 2022.62,3341.8 2024.23,3343.41 2029.91,3343.41 2035.77,3349.27 C18.1@2035.77,3405.51
NetC18_2: C18.2 C19.1 U1.9 | length 351.7
  Top Layer w10: C19.1@1968.55,3390.25 1968.8,3390.01 1989.4,3390.01 v1(2002.81,3376.6) ; C18.2@2076.77,3405.51 C18.2@2079.77,3405.51 ; C18.2@2078.23,3405.51 C18.2@2079.77,3405.51 ; v1(2101.02,3432.97) 2098.41,3430.36 2098.41,3424.15 C18.2@2079.77,3405.51 ; U1.9@2115.15,3327.14 2111.29,3331 2111.29,3367.51 2104.43,3374.38 2104.43,3379.31 2085.77,3397.97 2085.77,3399.51 C18.2@2079.77,3405.51
  Bottom Layer w10: v1(2002.81,3376.6) 2000.2,3379.21 2000.2,3402.9 1993.85,3409.25 1993.85,3428.89 2013.78,3448.82 2081.48,3448.82 2097.33,3432.97 v1(2101.02,3432.97)
NetC19_2: C19.2 J2.1 R5.1 R7.2 R8.2 U1.8 | length 2102.8
  Top Layer w10: v1(1860.24,3187.01) 1919.25,3187.01 R7.2@1921.22,3188.98 ; v1(1907.48,3389.76) 1907.72,3390.01 1937.6,3390.01 C19.2@1937.84,3390.25 ; v1(1931.1,3330.71) 1932.75,3332.35 1959.07,3332.35 R5.1@1960.72,3334 ; v1(2135.83,3377.95) 2138.28,3375.5 2138.28,3329.6 U1.8@2140.74,3327.14 ; J2.1@2584.76,3392.21 J2.1@2585.63,3391.34
  Bottom Layer w10: v1(2135.83,3377.95) 2134.02,3379.76 2134.02,3404.76 2129.02,3409.76 2129.02,3439.88 2102.44,3466.46 1932.99,3466.46 1907.48,3440.94 v1(1907.48,3389.76) 1907.48,3354.33 v1(1931.1,3330.71) 1931.1,3220.77 1899.94,3189.61 1861.24,3189.61 1858.63,3187.01 1858.63,3623.5 1878.01,3642.88 1899.26,3642.88 R8.2@1907.29,3650.92 2022.78,3535.43 2320.87,3535.43 2399.61,3456.69 2520.28,3456.69 J2.1@2585.63,3391.34 ; J2.1@2598.92,3404.63 J2.1@2612.2,3391.34
NetC20_1: C20.1 L1.2 M1.1 M1.2 M1.3 M1_2.1 M1_2.2 M1_2.3 M2.5 M2.6 M2.7 M2.8 M2.9 U1.20 | length 325.4
  Top Layer w10: M1.2@2028.48,2965.14 M1.2@2029,2965.67 ; C20.1@2401.72,3128.88 2388.83,3116 2366,3116 2365.47,3115.47 2323.73,3115.47 2319.87,3111.61 U1.20@2319.87,3094.86 2319.87,3086.54 2323.73,3082.68 2383.86,3082.68 2467.92,2998.62 M1_2.3@2467.92,2972.54
NetC20_2: C20.2 D1.1 U1.18 | length 469.2
  Top Layer w10: v1(2265.75,3051.18) 2267.22,3052.65 2267.22,3093.39 U1.18@2268.69,3094.86 ; v1(2356.16,3170.33) 2398.68,3170.33 C20.2@2401.57,3173.23 ; D1.1@2502.95,3132.87 2502.95,3122.63 2515.75,3109.83 v1(2515.75,3106.3)
  Bottom Layer w10: v1(2265.75,3051.18) 2265.75,3090.55 v1@2350.84,3175.65 ; v1(2356.16,3170.33) 2357.2,3169.29 2452.8,3169.29 2458.66,3163.43 ; 2458.66,3163.39 v1(2515.75,3106.3)
NetC21_2: C21.2 D1.2 U1.16 | length 775.3
  Top Layer w10: C21.2@2001.97,3085.63 2001.97,3090.13 2018.97,3107.13 2041.44,3107.13 2046.51,3112.2 v1(2050.2,3112.2) ; C21.2@2016.17,3086.63 C21.2@2016.17,3090.57 ; U1.16@2217.51,3094.86 2221.37,3091 2221.37,3056.45 2231.91,3045.91 v1(2231.91,3042.22) ; v1(2440.94,3237.2) 2475.25,3202.9 2500.26,3202.9 2502.95,3200.2 D1.2@2502.95,3189.96
  Bottom Layer w10: v1(2050.2,3112.2) 2050.2,3115.89 2062.42,3128.11 2062.42,3140.77 2069.49,3147.84 2218.5,3147.84 ; v1(2231.91,3042.22) 2231.91,3045.91 2218.5,3059.32 2218.5,3147.84 ; v1(2440.94,3237.2) 2361.47,3237.2 2272.11,3147.84 2218.5,3147.84
NetC22_1: C22.1 C23.1 C24.1 L1.1 R7.1 servo_F.1 U1.10 | length 3893.8
  Top Layer w10: v1(1752.87,2469.57) 1752.87,2356.38 1837.6,2271.65 ; R7.1@2025.63,3188.98 2031.76,3195.1 v1(2031.76,3287.4) ; v1(2081.13,3324.17) 2086.58,3324.17 U1.10@2089.56,3327.14
  Top Layer w145: C22.1@1984.25,1863.19 1942.91,1863.19 1797.24,2008.86 1797.24,2271.65 2194.78,2271.65 2248.43,2218 L1.1@2313.72,2218 ; C22.1@2049.72,1867.91 C24.1@2321.72,1867.91 2324.72,1864.91 C23.1@2589.72,1864.91 ; C23.1@2639.18,1842.71 v1(2746.98,1842.71) 2770.88,1818.81 v1(2759.16,1807.09) ; v1@2782.78,1830.71 2785.55,1827.94 2785.55,1782.37 v1(2787.4,1780.51) 2787.4,1790.35 2767.72,1810.04 v1(2788.39,1830.71)
  Layer 1 w10: v1(1752.87,2469.57) 1752.87,3188.77 1856.11,3292 1942.61,3292 1944.28,3290.33 1947.21,3287.4 v1(2031.76,3287.4)
  Bottom Layer w10: v1(2031.76,3287.4) 2065.91,3321.56 2078.52,3321.56 v1(2081.13,3324.17)
  Bottom Layer w145: v1(2746.98,1842.71) 2746.98,1819.26 v1(2759.16,1807.09) ; v1@2782.63,1783.62 2838.63,1727.62 2918.65,1727.62 servo_F.1@3037.72,1608.55 servo_F.1@3171.57,1608.55 ; v1(2787.4,1780.51) 2785.93,1781.99 2785.93,1816.44 2771.65,1830.71 v1(2788.39,1830.71)
  other v1: 2816.93,1798.23 2824.8,1825.79
NetC25_1: C25.1 U2.5 | length 124.7
  Top Layer w10: U2.5@3005.94,3134 3005.93,3228.33 C25.1@3005.91,3258.72
NetC26_2: C26.2 U2.7 | length 398.6
  Top Layer w10: U2.7@2954.76,3134 2958.62,3137.86 2958.62,3169.5 2970.47,3181.35 v1(2970.47,3185.04) ; v1(2979.33,3439.96) 3029.03,3439.96 C26.2@3029.15,3439.85
  Bottom Layer w10: v1(2970.47,3185.04) 2970.47,3216.54 2954.72,3232.28 2954.72,3314.96 2931.1,3338.58 2931.1,3391.73 v1(2979.33,3439.96)
NetC27_1: C27.1 C28.2 U2.9 | length 341.7
  Top Layer w10: v1(2776.57,3248.03) 2779.04,3250.49 2779.04,3273.13 C27.1@2781.5,3275.59 ; C28.2@2874.09,3215.47 C28.2@2871.62,3213 2892.28,3213 2903.89,3201.39 2903.89,3186.66 v1(2906.5,3184.06) ; U2.9@2903.58,3134 v1@2903.58,3184.06
  Bottom Layer w10: v1(2776.57,3248.03) 2799.56,3271.01 2843.47,3271.01 2847.84,3275.39 2856.13,3275.39 2906.5,3225.02 v1(2906.5,3184.06)
NetC27_2: C27.2 R15.1 R18.2 R19.2 U2.8 | length 931.9
  Top Layer w10: v1(2714.57,3102.36) R18.2@2751.69,3102.36 ; v1(2721.3,3276.73) 2721.87,3276.16 2750.22,3276.16 C27.2@2750.79,3275.59 ; v1(2734.25,3147.64) 2734.25,3151.32 2729.62,3155.95 2729.62,3180.5 2745.89,3196.77 R15.1@2745.89,3196.85 ; R19.2@2831.69,3354.33 2831.69,3400.84 2836.61,3405.76 v1(2836.61,3409.45) ; U2.8@2929.17,3134 2933.03,3137.86 2931.18,3139.71 2931.18,3190.16 2938.18,3197.16 v1(2938.18,3200.85)
  Bottom Layer w10: v1(2714.57,3102.36) 2714.57,3186.72 ; v1(2734.25,3147.64) 2734.57,3147.95 2734.57,3169.23 2722.85,3180.94 2720.34,3180.94 2714.57,3186.72 ; v1(2938.18,3200.85) 2938.18,3276.38 2879.92,3334.65 2879.92,3400.98 2874.06,3406.84 2839.22,3406.84 v1(2836.61,3409.45) 2834.01,3406.84 2834.01,3389.44 v1(2721.3,3276.73) 2721.3,3273.05 2714.57,3266.32 2714.57,3192.91 2714.57,3186.72
NetC28_1: C28.1 R15.2 | length 122.1
  Top Layer w10: R15.2@2777.56,3196.85 2777.56,3196.77 2798.49,3175.83 2806.45,3175.83 v1(2809.06,3173.23) ; v1(2812.99,3220.47) 2816.68,3220.47 2819.85,3217.3 2837.51,3217.3 C28.1@2841.81,3213
  Bottom Layer w10: v1(2809.06,3173.23) 2811.02,3175.2 2811.02,3218.5 v1(2812.99,3220.47)
NetC30_1: C30.1 L1_2.2 M1_3.1 M1_3.2 M1_3.3 M1_4.5-6-7-8 U2.20 | length 1033.1
  Top Layer w10: M1_3.1@3207.68,2774.7 3199.39,2782.99 3199.39,2791.93 3112.17,2879.16 U2.20@3108.31,2883.02 ; C30.1@3225.39,2854.33 3212.4,2867.33 3189.68,2867.33 3187.99,2869.02 3185.12,2869.02 3185.04,2869.09 3140.93,2869.09 U2.20@3108.31,2901.72 U2.20@3108.31,2892.37 ; U2.20@3108.31,2883.02 U2.20@3108.31,2892.37 ; U2.20@3108.31,2883.02 U2.20@3108.31,2892.37
  Top Layer w16.14: M1_4.5-6-7-8@2873.23,2663.39 2987.34,2663.39 2999.86,2675.9 2999.86,2688.78 3005.91,2694.83 v1(3005.91,2696.85) ; L1_2.2@2991.14,2488.15 3004.92,2501.93 v1(3004.92,2560.04) ; M1_3.3@3107.68,2774.7 3108.53,2775.55 M1_3.2@3157.68,2775.55 ; v1(3116.14,2825.79) 3118.17,2825.79 3131.42,2812.54 3135.34,2812.54 3152.46,2795.41 3152.46,2780.77 M1_3.2@3157.68,2775.55 ; M1_3.2@3157.68,2774.7 M1_3.2@3157.68,2775.55 ; M1_3.2@3157.68,2776.18 3159.16,2774.7 M1_3.1@3207.68,2774.7
  Bottom Layer w16.14: v1@3003.94,2559.06 v1(3004.92,2560.04) 3004.92,2695.87 v1(3005.91,2696.85) 3094.31,2785.26 3094.31,2801.93 3116.14,2823.76 v1(3116.14,2825.79)
NetC30_2: C30.2 D2.1 U2.18 | length 365.6
  Top Layer w10: v1@3057.11,2854.35 U2.18@3057.13,2901.72 ; v1(3178.15,2913.39) 3221.46,2913.39 C30.2@3225.39,2909.45 ; C30.2@3208.66,2915.35 3280.51,2915.35 3288.39,2907.48 D2.1@3303.64,2907.48
  Bottom Layer w10: v1(3057.09,2854.33) 3057.09,2893.7 3082.68,2919.29 v1@3178.15,2919.29
NetC31_2: C31.2 D2.2 U2.16 | length 743.4
  Top Layer w10: C31.2@2783.39,2958.5 2784.2,2957.69 v1(2828.2,2957.69) ; U2.16@3005.94,2901.72 3009.8,2897.86 3009.8,2861.99 3013.78,2858.02 v1(3013.78,2854.33) ; v1(3276.57,3007.87) 3279.18,3005.27 3279.18,2999.27 3303.64,2974.81 D2.2@3303.64,2964.57
  Bottom Layer w10: v1@2824.25,2963.58 2827.26,2963.58 2836.12,2954.72 2913.39,2954.72 2923.23,2944.88 3025.59,2944.88 ; v1(3013.78,2854.33) 3013.78,2855.19 3025.59,2867 3025.59,2944.88 ; v1(3276.57,3007.87) 3248.49,3007.87 3234.63,3021.73 3141.81,3021.73 3064.96,2944.88 3025.59,2944.88
NetC32_2: C32.2 RJ5.1 Y1.2 | length 303.7
  Top Layer w6: C32.2@3731.56,4101.47 3739.43,4101.47 3782.61,4144.65 Y1.2@3866.56,4144.65 3880.34,4144.65 3925.65,4189.96 RJ5.1@3998.56,4189.96
NetC34_2: C34.2 RJ4.1 Y2.1 | length 403.8
  Top Layer w6: C34.2@3858.46,4328 3858.46,4261.69 Y2.1@3849.77,4253 4010.01,4253 4099.98,4163.02 4099.98,4151.73 4111.72,4140 RJ4.1@4121.56,4140
NetC35_2: C35.2 RJ3.1 Y2.2 | length 433.2
  Top Layer w6: C35.2@3684.56,4244 3687.73,4247.17 3708.86,4247.17 3714.69,4253 Y2.2@3751.35,4253 3743.48,4260.86 3743.48,4293.92 3738.19,4299.21 3738.19,4354.33 3777.56,4393.7 3849.38,4393.7 3914.5,4328.57 3924.35,4328.57 3936.08,4316.84 RJ3.1@3936.08,4307
NetC40_1: C40.1 L1_2.1 MCM_F.1 R18.1 U2.10 | length 2475.1
  Top Layer w10: v1(2591.94,2346.42) 2610.65,2327.72 2610.65,2282.44 2637.22,2255.87 2902.97,2255.87 2926.14,2232.69 2926.14,2148.15 2956.14,2118.15 L1_2.1@2991.14,2118.15 ; R18.1@2785.43,3102.36 v1(2820.87,3102.36) ; v1(2848.43,3153.54) 2874.13,3153.54 2877.99,3149.68 U2.10@2877.99,3134
  Top Layer w16.14: L1_2.1@2991.72,2130 2991.72,2118.15 2991.72,2013.06 3046.77,1958 3074.33,1958 3101.89,1958 3445.79,1614.1 MCM_F.1@3445.79,1608.28 MCM_F.1@3579.65,1608.28
  Bottom Layer w10: 2592.52,2358.27 2615.08,2380.83 2615.08,2974.79 2676.39,3036.1 2754.6,3036.1 v1(2820.87,3102.36) 2845.82,3127.31 2845.82,3150.94 v1(2848.43,3153.54)
NetC41_1: C41.1 C42.1 Fans_F.1 L1_3.1 R28.1 U3.10 | length 2460.6
  Top Layer w10: v1(4635.83,2251.97) 4682.14,2205.66 4746.21,2205.66 4772.7,2179.16 C41.1@4772.7,2141.76 ; 4826.77,2960.94 4826.77,2974.41 R28.1@4824.8,2976.38 4825.65,2976.38 4831.92,2982.65 4831.92,2983.49 4847.85,2999.43 U3.10@4867.23,2999.43 ; v1(4828.74,2925.2) 4828.74,2960.94
  Top Layer w34.65: Fans_F.1@4740.72,1598.55 Fans_F.1@4874.57,1598.55 5003.7,1727.68 5003.7,1981.29 C42.1@5005.7,1983.29 ; C41.1@4772.7,2141.76 4772.7,2104.36 4799.2,2077.86 4873.73,2077.86 4968.3,1983.29 C42.1@5005.7,1983.29 ; L1_3.1@5247.2,2257.34 5232.72,2242.86 5232.72,2172.91 5043.11,1983.29 C42.1@5005.7,1983.29
  Bottom Layer w10: v1(4635.83,2251.97) 4614.17,2273.62 4614.17,2803.2 4661.37,2850.39 4816.93,2850.39 4828.74,2862.2 v1(4828.74,2925.2)
NetC53_1: C53.1 Um1.30 | length 137.5
  Top Layer w6: Um1.30@4671.41,4648.65 4672.41,4649.65 4721.11,4649.65 4742.13,4670.66 C53.1@4742.13,4728.35
NetC63_1: C63.1 U3.5@4995.18,2999.43 | length 166.1
  Top Layer w10: C63.1@4923.23,3132.73 4923.23,3131.89 4934.5,3120.62 4951.11,3104 4952.61,3104 4958.98,3097.63 v1(4962.66,3097.63) ; v1(4986.22,3051.18) 4986.22,3047.77 4995.18,3038.8 U3.5@4995.18,2999.43
  Bottom Layer w10: v1(4962.66,3097.63) 4983.61,3076.68 4983.61,3053.79 v1(4986.22,3051.18)
NetC64_2: C64.2 U3.7 | length 339.5
  Top Layer w10: v1(4775.59,3166.34) 4775.59,3170.02 4780.81,3175.25 C64.2@4780.81,3219.49 ; U3.7@4944,2999.43 4945.43,3000.85 4945.43,3049.76 v1(4946.85,3051.18)
  Bottom Layer w10: v1(4775.59,3166.34) 4802.17,3139.76 4879.21,3139.76 4946.85,3072.13 v1(4946.85,3051.18)
NetC65_1: C65.1 R25.2 | length 94.3
  Top Layer w10: C65.1@4678.01,3112.2 4681.53,3108.68 4681.53,3078.39 4707.39,3052.53 4718.22,3052.53 4726.38,3044.38 R25.2@4726.38,3044.29
NetC65_2: C65.2 C66.1 U3.9 | length 293.1
  Top Layer w10: C65.2@4707.82,3112.2 v1(4744.09,3112.2) ; v1(4812.99,3051.18) 4814.89,3051.18 4825.14,3061.44 4846.17,3061.44 4856.07,3051.54 4856.07,3047.47 4861.34,3042.2 4881.03,3042.2 4888.96,3034.26 4888.96,3003.29 U3.9@4892.82,2999.43
  Bottom Layer w10: v1(4744.09,3112.2) 4744.09,3057.04 4749.95,3051.18 v1(4812.99,3051.18)
NetC66_2: C66.2 R25.1 R28.2 R29.2 U3.8 | length 476.7
  Top Layer w10: v1(4746.13,2985.04) 4748.73,2987.65 4763.41,2987.65 4763.94,2988.19 4777.75,2988.19 R25.1@4777.75,3041.85 ; R29.2@4777.56,2901.57 4777.28,2901.86 4777.28,2964.25 4783.13,2970.11 4784.79,2970.11 R28.2@4791.06,2976.38 4790.21,2976.38 4778.4,2988.19 ; C66.2@4876.09,3061.44 4879.8,3057.72 4908.81,3057.72 v1(4911.42,3055.12) ; v1@4911.67,3055.37 4918.41,3048.63 U3.8@4918.41,2999.43
  Bottom Layer w10: v1(4746.13,2985.04) 4800,2985.04 4870.08,3055.12 v1(4911.42,3055.12)
NetC67_2: C67.2 D3.2 U3.16 | length 1018.5
  Top Layer w10: v1(4773.62,2751.97) 4773.62,2792.86 C67.2@4779.98,2799.22 ; v1(4994.09,2716.54) 4994.64,2717.08 4994.64,2766.6 U3.16@4995.18,2767.15 ; v1(5275.59,2719.49) 5277.07,2720.96 5277.07,2760.33 D3.2@5278.54,2761.81
  Bottom Layer w10: v1(4773.62,2751.97) 4827.76,2806.1 5004.92,2806.1 ; v1(4994.09,2716.54) 4994.09,2795.28 5004.92,2806.1 ; v1(5275.59,2719.49) 5276.57,2720.47 5276.57,2921.14 5270.72,2927 5156.65,2927 5050.85,2821.2 5030.85,2821.2 5026.57,2816.93 5015.75,2816.93 5004.92,2806.1
NetC68_1: C68.1 L1_3.2 Q1.1 Q1.2 Q1.3 Q2.5-6-7-8 U3.20 | length 1508
  Top Layer w10: Q2.5-6-7-8@4895.67,2543.31 Q2.5-6-7-8@4900.94,2538.04 ; Q1.3@5117.52,2665.45 5109.24,2673.74 5109.24,2679.31 5107.48,2681.07 5107.48,2738.52 5097.55,2748.45 U3.20@5097.55,2767.15 5163.13,2767.15 C68.1@5164.64,2768.66
  Top Layer w34.65: Q2.5-6-7-8@4900.94,2538.04 v1@5019.05,2538.04 ; v1(5015.61,2221.84) 5075.72,2221.84 5083.9,2230.01 L1_3.2@5083.9,2271.65 ; Q1.3@5117.52,2665.45 Q1.2@5167.52,2665.45 Q1.1@5217.52,2665.45 5265.65,2665.45 v1(5265.75,2665.35)
  Bottom Layer w34.65: v1(5015.61,2221.84) 5003.55,2296.86 5003.11,2299.59 5003.11,2313.57 5062.71,2395.99 5062.71,2409.97 5062.28,2412.7 5045.8,2515.23 5035.92,2525.12 v1(5021.65,2535.43) ; v1@5017.1,2222.47 5082.71,2222.47 5280.51,2420.28 5280.51,2650.59 v1(5265.75,2665.35)
NetC68_2: C68.2 D3.1 U3.18 | length 573.2
  Top Layer w10: v1(5037.4,2720.47) 5037.4,2724.16 5042.51,2729.26 5042.51,2763.29 U3.18@5046.37,2767.15 ; v1(5233,2736) 5200.22,2768.78 5200.22,2794.04 5194.2,2800.05 5193.29,2800.05 5169.56,2823.78 5159.72,2823.78 5275.85,2823.78 5278.54,2821.08 D3.1@5278.54,2818.9
  Bottom Layer w10: v1(5037.4,2720.47) 5037.4,2775.59 5048.41,2786.6 5182.4,2786.6 v1(5233,2736)
NetC71_2: C71.2 U4.5 | length 168.2
  Top Layer w10: C71.2@3568.9,3085.8 3574.16,3080.54 3574.16,3053.79 v1(3576.76,3051.19) ; U4.5@3624.54,2957.28 3626.24,2958.99 3626.24,3006.17 v1(3627.95,3007.87)
  Bottom Layer w10: v1(3576.76,3051.19) 3600.39,3051.19 3626.87,3024.71 3626.87,3008.96 v1(3627.95,3007.87)
NetC72_2: C72.2 U4.7 | length 402.2
  Top Layer w10: v1(3562.99,3246.06) 3599.11,3246.06 C72.2@3603.04,3250 ; U4.7@3573.35,2957.28 3577.21,2961.14 3577.21,2984.2 3593.86,3000.84 v1(3593.86,3004.53)
  Bottom Layer w10: v1(3562.99,3246.06) 3520.86,3203.93 3520.86,3161.01 3505.91,3146.06 3505.91,3087.14 3568.69,3024.35 3574.04,3024.35 v1(3593.86,3004.53)
NetC73_1: C73.1 R45.1 R48.1 R49.2 U4.8 | length 1212.5
  Top Layer w10: v1(3257.87,3055.12) R45.1@3289.37,3055.12 ; v1(3355.25,2886.54) 3422.52,2886.54 R48.1@3437.99,2871.06 ; v1(3423.23,3272.64) 3476.57,3272.64 R49.2@3482.28,3266.93 ; C73.1@3452.76,3055.12 3462.6,3045.28 v1(3500.98,3045.28) ; U4.8@3547.76,2957.28 3548.49,2958.01 v1(3548.49,3007.15)
  Bottom Layer w10: v1@3359.25,2886.81 3380.91,2908.46 3380.91,2945.87 3273.72,3053.05 3259.94,3053.05 3242.13,3070.87 3242.13,3208.66 3273.62,3240.16 3392.71,3240.16 3423.23,3270.68 v1(3423.23,3272.64) 3423.23,3268.95 3438.98,3253.2 3438.98,3161.54 3467.2,3133.32 3467.2,3082.01 3500.98,3048.23 v1(3500.98,3045.28) 3504.67,3045.28 3519.86,3030.09 3525.55,3030.09 v1(3548.49,3007.15)
NetC73_2: C73.2 C74.2 U4.9 | length 515.6
  Top Layer w10: v1(3389.76,3186.02) 3386.08,3186.02 3375.79,3175.74 3335.19,3175.74 C74.2@3332.68,3173.23 3393.7,3112.2 C73.2@3393.7,3055.12 ; v1(3509.84,3005.4) 3509.84,3001.72 3518.31,2993.24 3518.31,2961.14 U4.9@3522.17,2957.28
  Bottom Layer w10: v1(3389.76,3186.02) 3427.17,3148.62 3427.17,3043.31 3462.6,3007.87 3507.37,3007.87 v1(3509.84,3005.4)
NetC74_1: C74.1 R45.2 | length 240.6
  Top Layer w10: v1(3273.62,3141.73) 3276.23,3144.34 3276.23,3151.37 3298.09,3173.23 C74.1@3298.93,3173.23 ; R45.2@3328.74,3055.12 3345.56,3038.3 3345.56,3023.01 v1(3348.16,3020.41)
  Bottom Layer w10: v1(3273.62,3141.73) 3273.62,3089.57 3306.9,3056.29 3312.28,3056.29 v1(3348.16,3020.41)
NetC75_2: C75.2 D4.2 U4.16 | length 697.2
  Top Layer w10: C75.2@3426.91,2747.33 3429.58,2750 v1(3467.52,2750) ; U4.16@3624.54,2725 3628.39,2721.14 3628.39,2688.28 3635.83,2680.85 v1(3635.83,2677.17) ; v1(3856.3,2830.71) 3859.99,2830.71 3870.67,2820.02 3905.77,2820.02 3908.46,2817.33 D4.2@3908.46,2807.09
  Bottom Layer w10: v1(3467.52,2750) 3489.76,2772.24 3615.55,2772.24 3635.83,2751.97 3635.83,2724.41 ; v1(3635.83,2677.17) 3635.83,2724.41 ; v1(3856.3,2830.71) 3855.44,2830.71 3843.63,2842.52 3753.94,2842.52 3635.83,2724.41
NetC76_1: C76.1 L1_4.2 Q3.1 Q3.2 Q3.3 Q4.5-6-7-8 U4.20 | length 1525.7
  Top Layer w10: C76.1@3801.18,2767.72 C76.1@3809.05,2759.84 ; C76.1@3801.26,2767.24 3774.17,2740.16 3730.76,2740.16 3726.9,2736.3 3726.9,2688.32 3784.06,2631.16 3784.06,2618.86 3805.95,2618.86
  Top Layer w34.65: Q4.5-6-7-8@3562,2488.09 Q4.5-6-7-8@3562,2488.09 3686.96,2488.14 v1(3687.01,2488.19) ; v1(3805.12,2645.67) 3802.51,2643.06 3802.51,2628.3 3794.26,2620.05 3784.06,2609.84 Q3.3@3784.06,2608.37 3805.95,2608.37 Q3.2@3834.06,2608.37 Q3.1@3884.06,2608.37 ; v1(3852.36,1858.27) 3852.36,1934.25 L1_4.2@3861.22,1943.11
  Bottom Layer w34.65: v1(3805.12,2645.67) 3805.12,2606.3 v1(3687.01,2488.19) 3687.01,2023.62 v1(3852.36,1858.27)
NetC76_2: C76.2 D4.1 U4.18 | length 308.6
  Top Layer w10: U4.18@3675.72,2725 3679.57,2728.86 3679.57,2755.55 3738.98,2814.96 3793.31,2814.96 C76.2@3801.18,2822.83 3817.83,2806.18 3841.79,2806.18 3897.97,2750
NetC80_1: C80.1 U5.5@4258.9,2888.01 | length 161.2
  Top Layer w10: v1(4214.57,3000) C80.1@4214.57,3028.4 ; U5.5@4258.9,2888.01 4260.35,2889.46 4260.35,2939.49 v1(4261.81,2940.94)
  Bottom Layer w10: v1(4214.57,3000) 4217.17,2997.39 4217.17,2985.58 v1(4261.81,2940.94)
NetC81_2: C81.2 U5.7 | length 427.9
  Top Layer w10: U5.7@4207.72,2888.01 4211.57,2891.87 4211.57,2922.46 4226.38,2937.26 v1(4226.38,2940.94) ; v1(4230.87,3216.02) 4261.22,3216.02 4271.22,3226.02 C81.2@4271.22,3236
  Bottom Layer w10: v1(4226.38,2940.94) 4183.07,2984.25 4183.07,3125.98 4230.87,3173.79 v1(4230.87,3216.02)
NetC82_1: C82.1 R56.2 | length 235.4
  Top Layer w10: C82.1@3996.98,3122.04 3996.98,3098.8 4002.32,3093.47 v1(4002.32,3089.78) ; R56.2@4009.84,2963.52 4012.86,2960.5 4012.86,2929.2 v1(4012.99,2929.07)
  Bottom Layer w10: v1(4002.32,3089.78) 4002.32,3087.79 4012.99,3077.11 v1(4012.99,2929.07)
NetC82_2: C82.2 C83.2 U5.9 | length 412.1
  Top Layer w10: C82.2@4027.69,3122.04 v1(4059.58,3122.04) ; v1(4057.09,2929.13) 4057.09,2931.55 4069.74,2944.2 C83.2@4069.74,2972.44 ; v1(4151.41,2932.91) 4153.97,2930.34 4153.97,2890.57 U5.9@4156.54,2888.01
  Bottom Layer w10: v1@4063.96,3115 4063.96,3026.56 4057.09,3019.68 v1(4057.09,2929.13) 4119.6,2929.13 4123.37,2932.91 v1(4151.41,2932.91)